# Altium PCB PCB1.PcbDoc
Units mm, origin at the board's own origin, x right, y up, seen from the top; angles counter-clockwise.
Board outline 47.1 x 30 mm, 2 copper layers (Top Layer, Bottom Layer); 6 components, 10 nets, 20 pads, 1 vias.
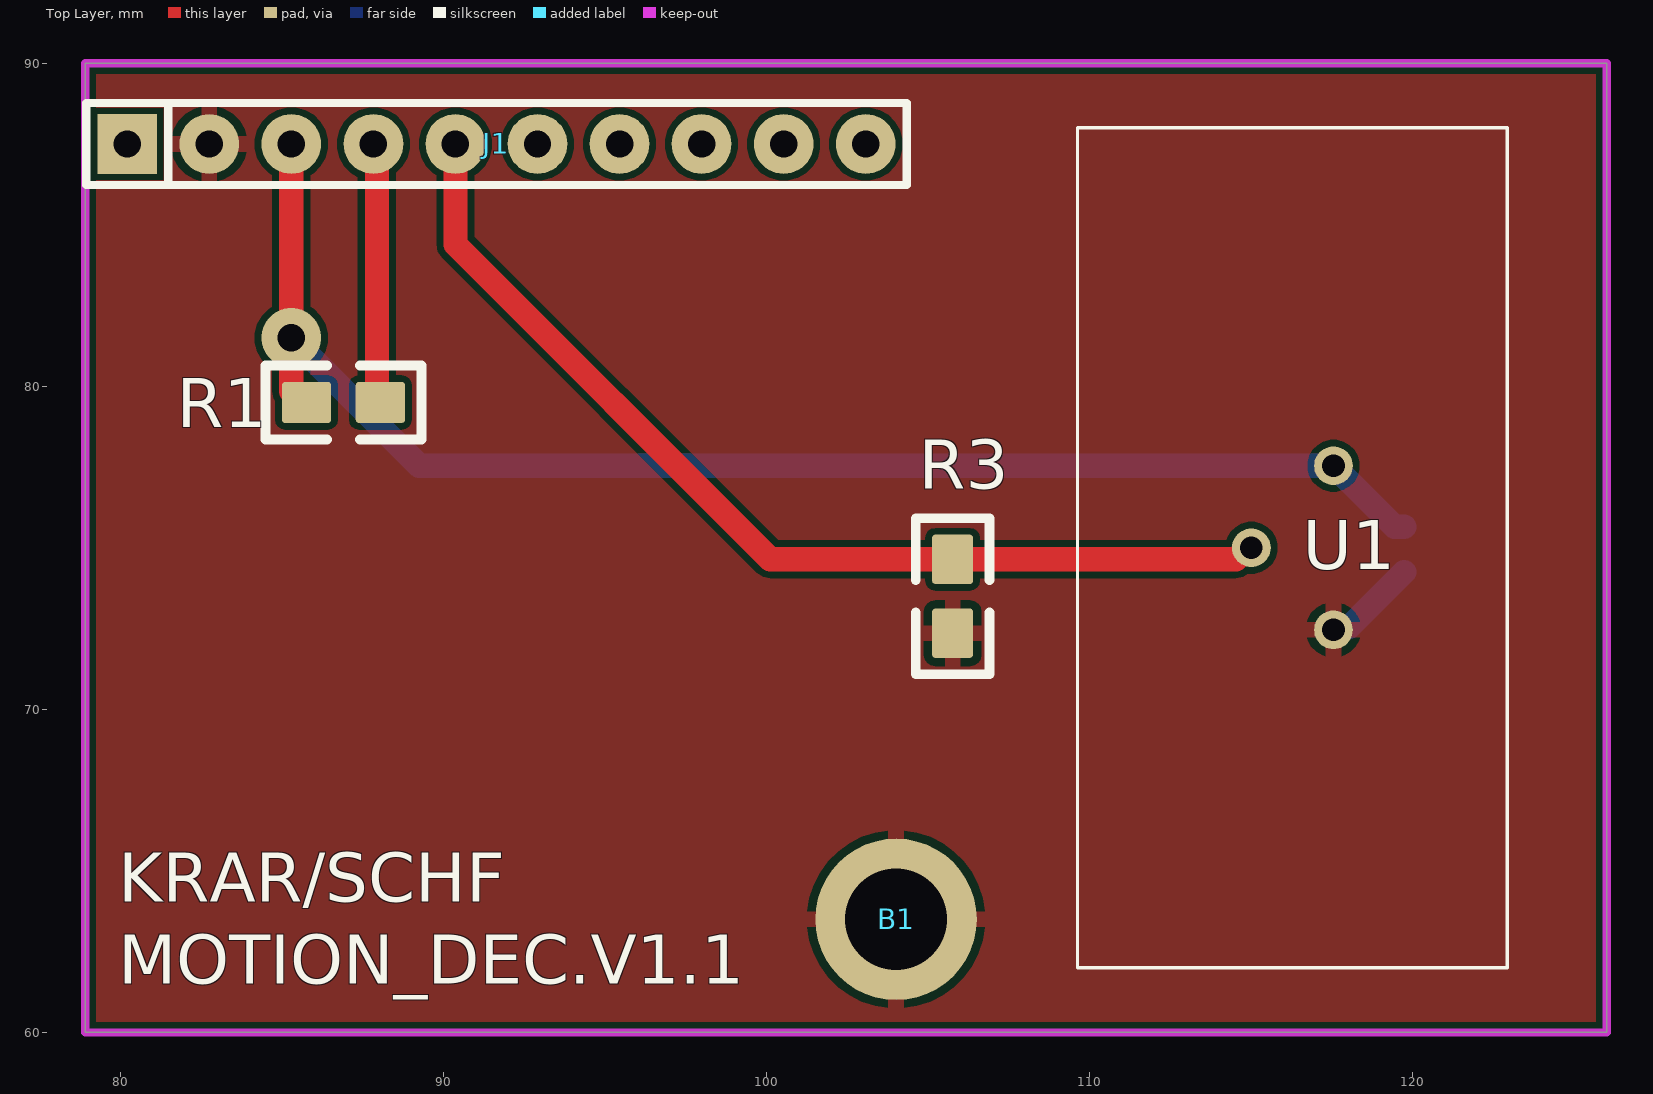
[diagram p0: Top Layer view]
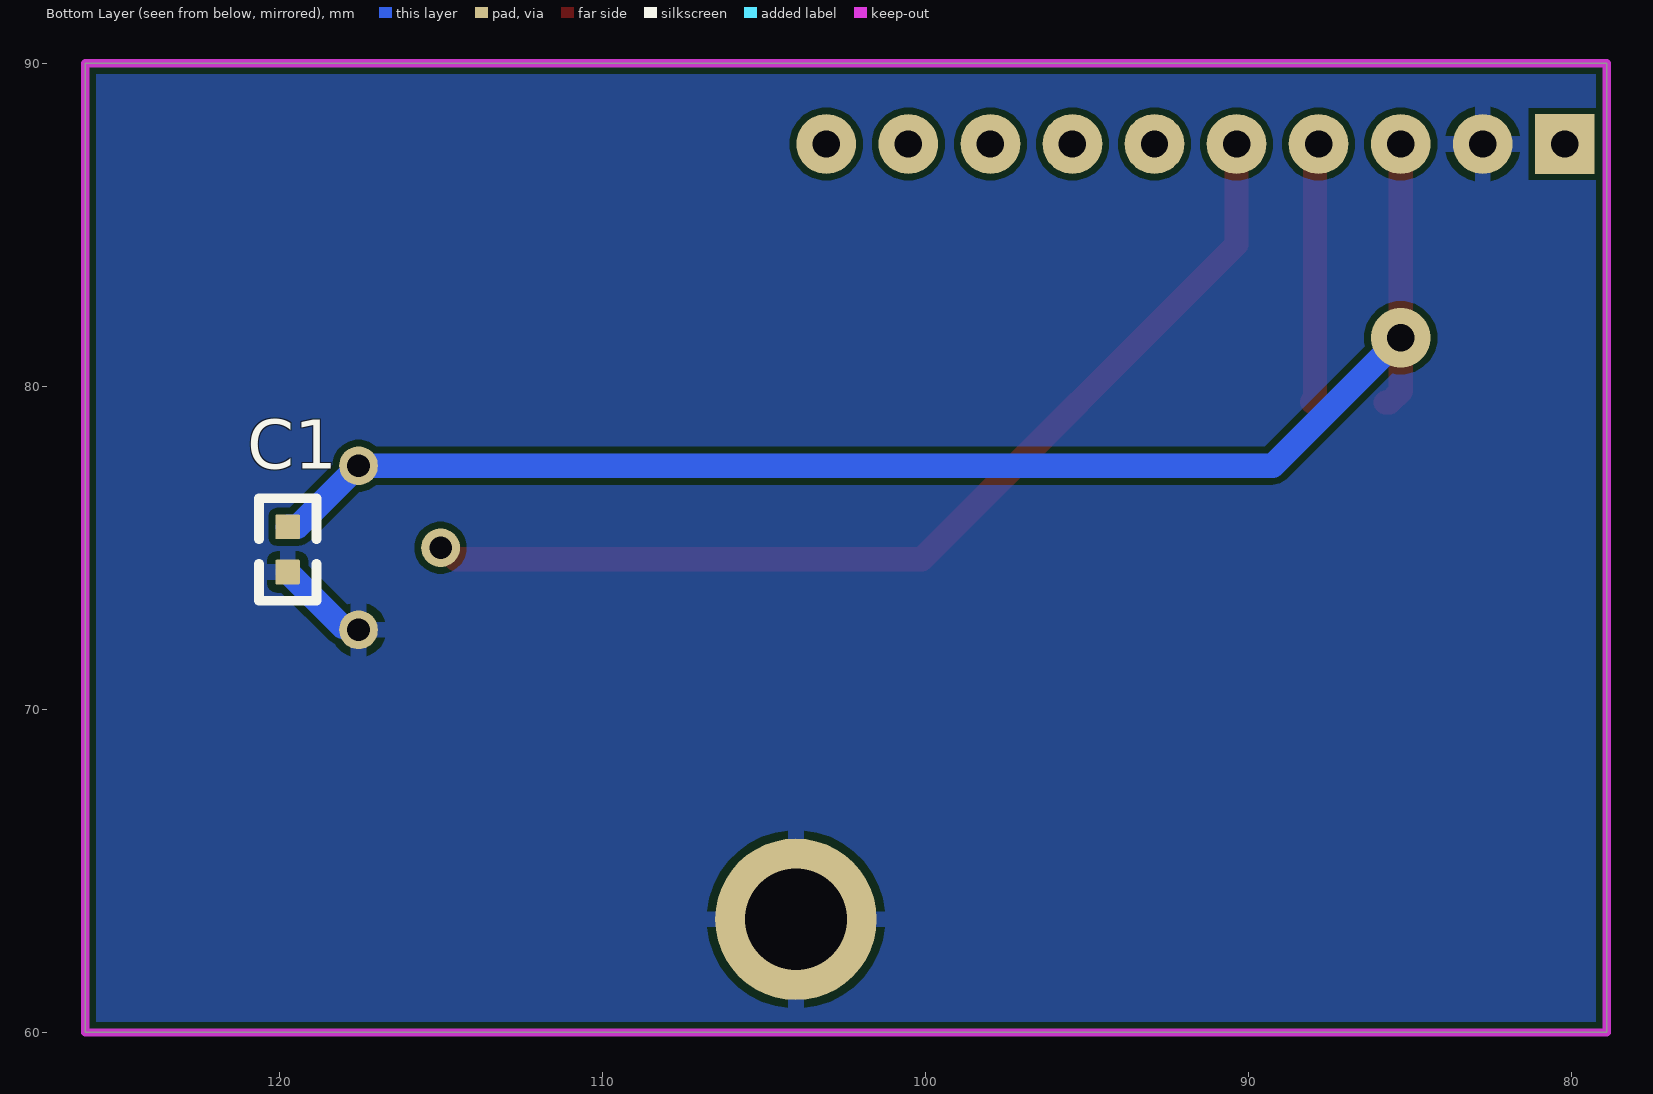
[diagram p1: Bottom Layer view, seen from below]

## Layer stack, top to bottom
Top Solder: solder mask 0.0102, Solder Resist, Dk 3.5
Top Layer: signal copper 0.0356
Dielectric 1: dielectric 0.32, FR-4, Dk 4.8
Bottom Layer: signal copper 0.0356
Bottom Solder: solder mask 0.0102, Solder Resist, Dk 3.5

## Board outline
78.9,60 78.9,90 126,90 126,60

## Design rules (kind name [scope] priority, off if disabled: settings)
Clearance [All] p1: gap=0.2 ignorepadtopadclearanceinfootprint=FALSE except(0.1: Arc-Arc Arc-Track Arc-SMDPad Arc-THPad Arc-Via Arc-Text Arc-Hole Track-Track Track-SMDPad Track-THPad Track-Via Track-Text Track-Hole SMDPad-SMDPad SMDPad-THPad SMDPad-Via SMDPad-Text SMDPad-Hole THPad-THPad THPad-Via THPad-Text THPad-Hole Via-Via Via-Text Via-Hole Text-Text Text-Hole)
HoleSize [All] p1: absolutevalues=TRUE maxlimit=5 minlimit=0.5 maxpercent=80.000 minpercent=20.000
MinimumSolderMaskSliver [All] p1: minsoldermaskwidth=0
PolygonConnect [All] p1: connectstyle=Relief reliefconductorwidth=0.5 reliefentries=4 polygonreliefangle="90 Angle" airgapwidth=0.25
RoutingVias [All] p1: holewidth=0.85 width=1.85 viastyle="Through Hole" minholewidth=0.6 minwidth=1.2 maxholewidth=1 maxwidth=2
SilkToSilkClearance [All] p1: silktosilkclearance=0
SilkToSolderMaskClearance [IsPad] p1: minsilkscreentomaskgap=0 clearancetoexposedcopper=TRUE
SolderMaskExpansion [All] p1: expansion=0.102 istentingtop=FALSE
Width [All] p1: maxlimit=6 minlimit=0.2 preferedwidth=0.75
26 further rules are at their usual default settings.

## Components (designator, comment, footprint, x,y, rotation, side; value= is the part's Value field where it differs from the comment)
B1 "Schraube" "B_Schraube-M3 PAD" 104,63.5 r0 top
C1 "10µF" C_SMD_0603 119.734,74.948 r90 bottom
J1 "MODULE_COM" SIP-10 91.63,87.5 r0 top
R1 "22k" R_SMD_0805 86.893,79.5 r180 top
R3 ">33k" R_SMD_0805 105.75,73.5 r90 top
U1 "EKMB1305111K" EKMB1305111K 117.54,72.46 r90 top

## Footprints (in the part's own frame and the unit in brackets; to place one, negate y for a bottom-side part, rotate by r counter-clockwise, add the part's x,y. Pads: shape width x height; smd on the part's side, far side on the other; paste and mask are expansions set on the pad)
"B_Schraube-M3 PAD" [mm] "LB-2024-04-18"
  round 5 hole 3.15 unplated: 1(0,0)
C_SMD_0603 [mil] "LB-2024-04-17"
  rrect10% 30x30 smd paste-0.79 mask+1.97: 1(-27.5,0) 2(27.5,0)
  silkscreen extent -62,-35 62,35
EKMB1305111K [mm]
  round 1.2 hole 0.7: 1(0,0) 2(2.54,2.54) 3(5.08,0)
  silkscreen extent -10.46,-5.38 15.54,7.92, body extent -10.46,-5.38 15.54,7.92, height 16.7
R_SMD_0805 [mil] "LB-2024-04-17"
  rrect15% 60x50 smd paste-0.79 mask+1.97: 1(-45,0) 2(45,0)
  silkscreen extent -95,-45 95,45
SIP-10 [mm] "LB-2024-04-17"
  rect 1.85x1.85 hole 0.85: 1(-11.43,0)
  round 1.85 hole 0.85: 2(-8.89,0) 3(-6.35,0) 4(-3.81,0) 5(-1.27,0) 6(1.27,0) 7(3.81,0) 8(6.35,0) 9(8.89,0) 10(11.43,0)
  silkscreen extent -12.7,-1.27 12.7,1.27

## Part data
B1: library part B_Schraube, "Schraubenloch für M3 Schrauben"
C1: library part C_SMD_KO, "Kondensator SMD Universal, Keramik, Folie, usw."
J1: library part J_THT_CON10, "Stecker"
R1 R3: library part R_SMD_Widerstand, "Widerstand SMD"
U1: "Undefined or Miscellaneous", Manufacturer_Name=Panasonic, Mouser Part Number=667-EKMB1305111K, Arrow Part Number=EKMB1305111K, Arrow Price/Stock=https://www.arrow.com/en/products/ekmb1305111k/panasonic, Datasheet Link=https://datasheet.datasheetarchive.com/originals/distributors/DKDS41/DSANUWW0039436.pdf, Height=16.6mm, Manufacturer_Part_Number=EKMB1305111K, Mouser Price/Stock=https://www.mouser.co.uk/ProductDetail/Panasonic/EKMB1305111K?qs=YCa%2FAAYMW02Pb%252BcF%2FXXwVw%3D%3D

## Via types
v1: diameter 1.85, hole 0.85, Top Layer to Bottom Layer, 1 vias

## Nets (pads, with @x,y where several pads share a name; then routed paths per layer and width w, separated by ;. In a path a pad name is that pad's centre, name@x,y a point inside that pad or via, vN(x,y) a via of type N, cw(c..) or ccw(c..) an arc to the next point about the centre after c; other vN are vias at no path point)
3,3V: C1.2 J1.3 R1.2 U1.3 | length 45.1
  Top Layer w0.75: J1.3 v1(85.28,81.5) 85.28,79.843 85.623,79.5 R1.2
  Bottom Layer w0.75: v1(85.28,81.5) 89.24,77.54 U1.3 119.427,75.653 119.728,75.653 C1.2
5V: J1.1
GND: B1.1 C1.1 J1.2 R3.1 U1.1 | length 2.9
  Bottom Layer w0.75: U1.1 117.626,72.546 118.03,72.546 C1.1
NetJ1_4: J1.4 R1.1 | length 8.1
  Top Layer w0.75: J1.4 87.928,87.392 87.928,79.608 R1.1@88.018,79.518
NetJ1_5: J1.5 R3.2 U1.2 | length 31.9
  Top Layer w0.75: J1.5 90.36,84.39 100.107,74.643 R3.2 114.521,74.643 114.878,75 U1.2
NetJ1_6: J1.6
NetJ1_7: J1.7
NetJ1_8: J1.8
NetJ1_9: J1.9
NetJ1_10: J1.10

## Polygon pours and split planes (outlines as drawn)
GND on Bottom Layer "NONET_L-01_P-001" (solid, remove dead copper, pour order 1): 75.5,92.5 75.75,92.75 128.25,92.75 128.25,60 129,59.25 128.5,58.75 77.5,58.75
GND on Top Layer "NONET_L-01_P-001" (solid, remove dead copper, pour order 0): 75.25,92.5 75.5,92.75 128,92.75 128,60 128.75,59.25 128.25,58.75 77.25,58.75

## Keep-outs
Keep-Out Layer:
  the board outline again, w0.254

## Silkscreen, mask and mechanical layers (free items; w line width, h text height)
Top Overlay:
  text "KRAR/SCHF" at 79.922,64.046 h1.52
  text "MOTION_DEC.V1.1" at 79.922,61.506 h1.52
Bemaßung (Mech3):
  lines w0.254: 78.9,90.646 78.9,91.154 ; 80.424,90.392 78.9,90.9 ; 80.424,91.408 78.9,90.9 ; 96.077,90.9 78.9,90.9 ; 108.823,90.9 126,90.9 ; 124.476,90.392 126,90.9 ; 124.476,91.408 126,90.9 ; 126,90.646 126,91.154 ; 126.392,61.524 126.9,60 ; 126.392,88.476 126.9,90 ; 126.646,60 127.154,60 ; 126.646,90 127.154,90 ; 126.9,69.896 126.9,60 ; 126.9,80.104 126.9,90 ; 127.408,61.524 126.9,60 ; 127.408,88.476 126.9,90
  text "47.1 (mm)" at 96.331,89.986 h1.52
  text "30 (mm)" at 127.814,70.15 h1.52 r90